# EAGLE board 555flasher (EAGLE 7.6.0)
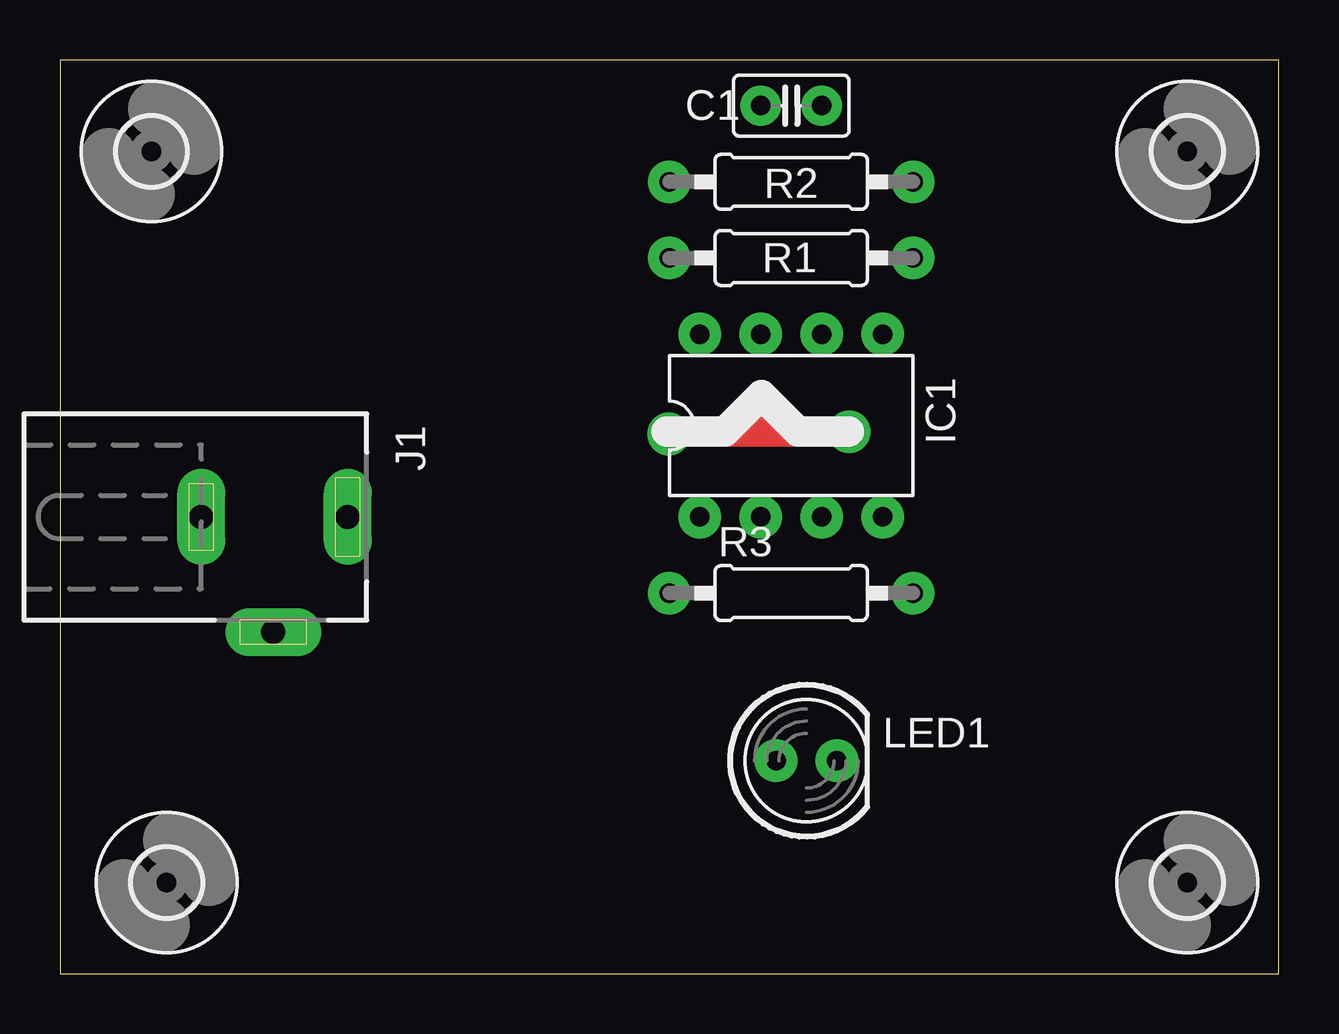
[diagram p0: board, top side]
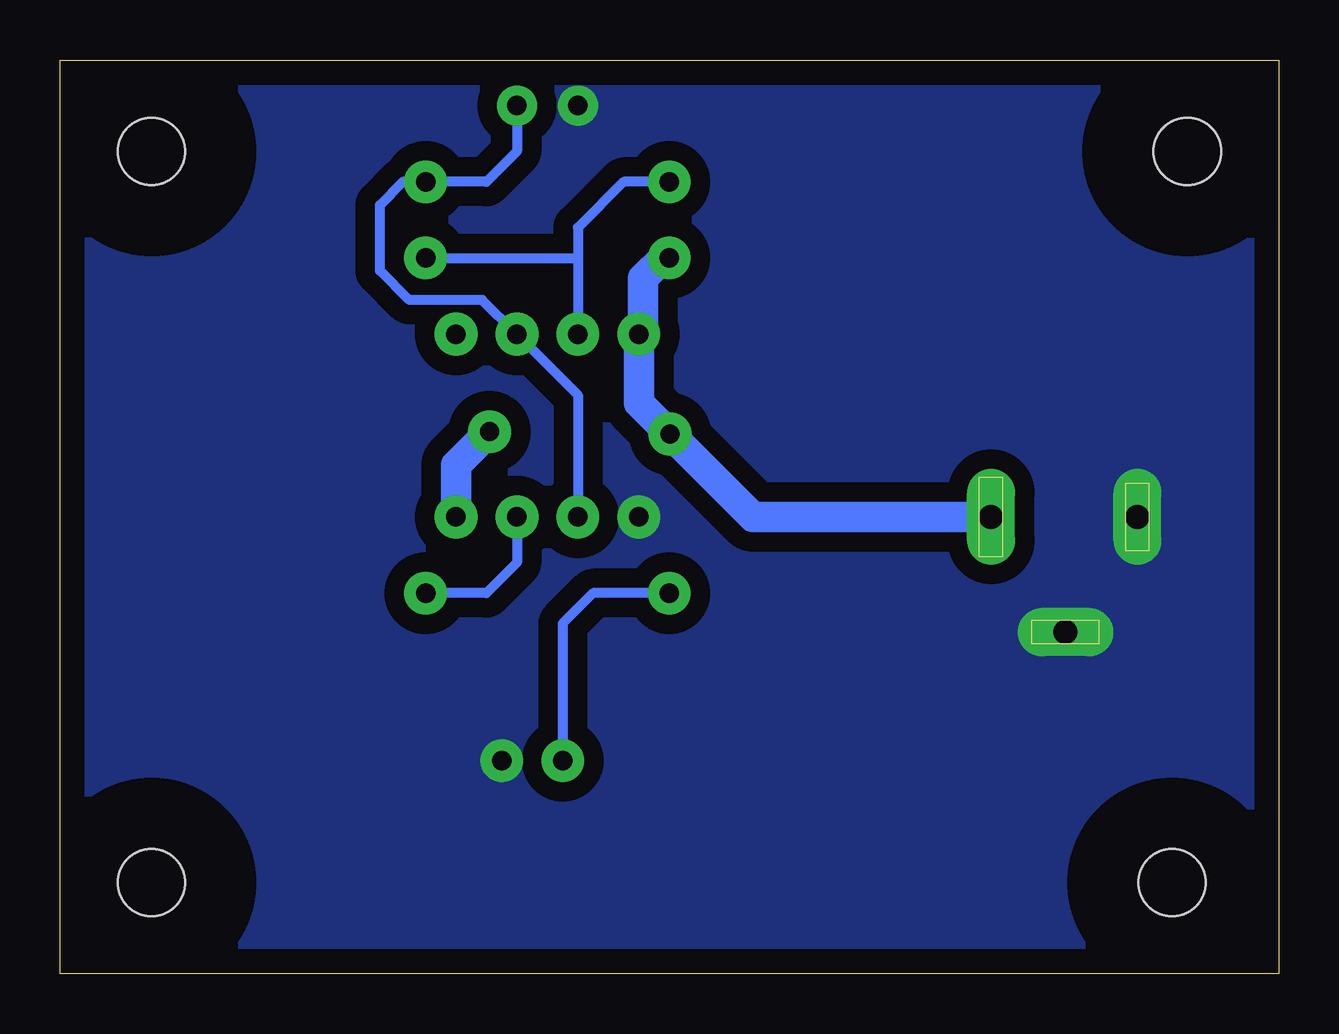
[diagram p1: board, bottom side, seen from below]

Size 50.8 x 38.1 mm. Coordinates in mm from the lower left corner, seen from the top.
Outline: 0,0 50.8,0 50.8,38.1 0,38.1 0,0
Copper layers (1*16): Top 0.035mm / dielectric 1.5mm / Bottom 0.035mm
Design rules "default": minimum track width 10mil, minimum drill 24mil, track to track 8mil, track to pad 8mil, pad to pad 8mil, via to via 8mil, smd to smd 8mil, copper to edge 40mil, drill to drill 8mil, minimum pad ring 10mil, minimum via ring 8mil, stop-mask expansion 4mil, vias tented up to drill 0mil, thermal gap 10mil

## Footprints (pad centres in the part's own frame; a part is rotated, then mirrored left to right if it is on the bottom)
C025-025X050 = drill 0.813 pad 1.676: 1 -1.27,0; 2 1.27,0
DIL08 = drill 0.813 pad 1.778: 1 -3.81,-3.81; 2 -1.27,-3.81; 3 1.27,-3.81; 4 3.81,-3.81; 5 3.81,3.81; 6 1.27,3.81; 7 -1.27,3.81; 8 -3.81,3.81
DCJ0202 = drill 1 pad 2 long: 1 0,3.1; 2 4.8,0; 3 0,-3
LED5MM = drill 0.813 pad 1.778: A -1.27,0; K 1.27,0
0207/10 = drill 0.813 pad 1.778: 1 -5.08,0; 2 5.08,0
2,8 = hole 2.8: 0,0

## Placement (x,y rotation side)
C1  10µF  [C025-025X050]  30.48,36.2 0 top
IC1  LM555N  [DIL08]  30.48,22.86 0 top
J1  DCJ0202  [DCJ0202]  8.89,19.05 270 top
LED1  [LED5MM]  31.12,8.89 0 top
R1  1k  [0207/10]  30.48,29.84 0 top
R2  10k  [0207/10]  30.48,33.02 0 top
R3  330E  [0207/10]  30.48,15.88 0 top
U$1  [2,8]  3.81,34.29 0 top
U$2  [2,8]  4.45,3.81 0 top
U$3  [2,8]  46.99,3.81 0 top
U$4  [2,8]  46.99,34.29 0 top

## Library data of the parts
C1 R1-R3 = rcl
IC1 = linear
J1 = con-jack; OC_FARNELL: unknown; OC_NEWARK: unknown
LED1 = led
U$1-U$4 = holes

## Nets
1: C1.2 IC1.2 IC1.6 R2.2
GND: C1.1 IC1.1 J1.2 J1.3 LED1.K
N$1: IC1.7 R1.2 R2.1
N$4: LED1.A R3.1
OUT: IC1.3 R3.2
VCC: IC1.4 IC1.8 J1.1 R1.1

## Tracks (layer width: path | path; a pad name or v marks a point on that pad's centre or on a via)
1
  Bottom 0.406: IC1.2 29.21,24.13 IC1.6 31.78,26.67 33.2,28.09 36.25,28.09 37.46,29.31 37.46,32.05 36.5,33.02 R2.2 33.02,33.02 31.75,34.29 C1.2
GND
  pour Bottom (isolate 0.813, no thermals): 0.64,37.46 50.16,37.46 50.16,0.63 0.64,0.63
N$1
  Bottom 0.406: R2.1 27.3,33.02 29.21,31.11 29.21,29.84 | 29.21,29.84 IC1.7 | R1.2 29.21,29.84
N$4
  Bottom 0.406: R3.1 28.57,15.87 29.84,14.6 LED1.A
OUT
  Bottom 0.406: IC1.3 31.75,17.14 33.02,15.87 R3.2
VCC  (via drill 0.8 pad 1.78)
  Top 1.27: v32.89,22.61 25.48,22.61 v25.37,22.5
  Bottom 1.27: R1.1 25.65,29.84 26.49,29.01 26.49,26.85 IC1.8 26.67,23.8 v25.37,22.5 21.92,19.05 J1.1 | IC1.4 34.29,21.21 v32.89,22.61